# Altium PCB 24PowerF100.PcbDoc
Units mil, origin at the board's own origin, x right, y up, seen from the top; angles counter-clockwise.
Board outline 1675.62 x 1270.25 mil, 2 copper layers (Top Layer, Bottom Layer); 2 components, 3 nets, 25 pads, 0 vias.
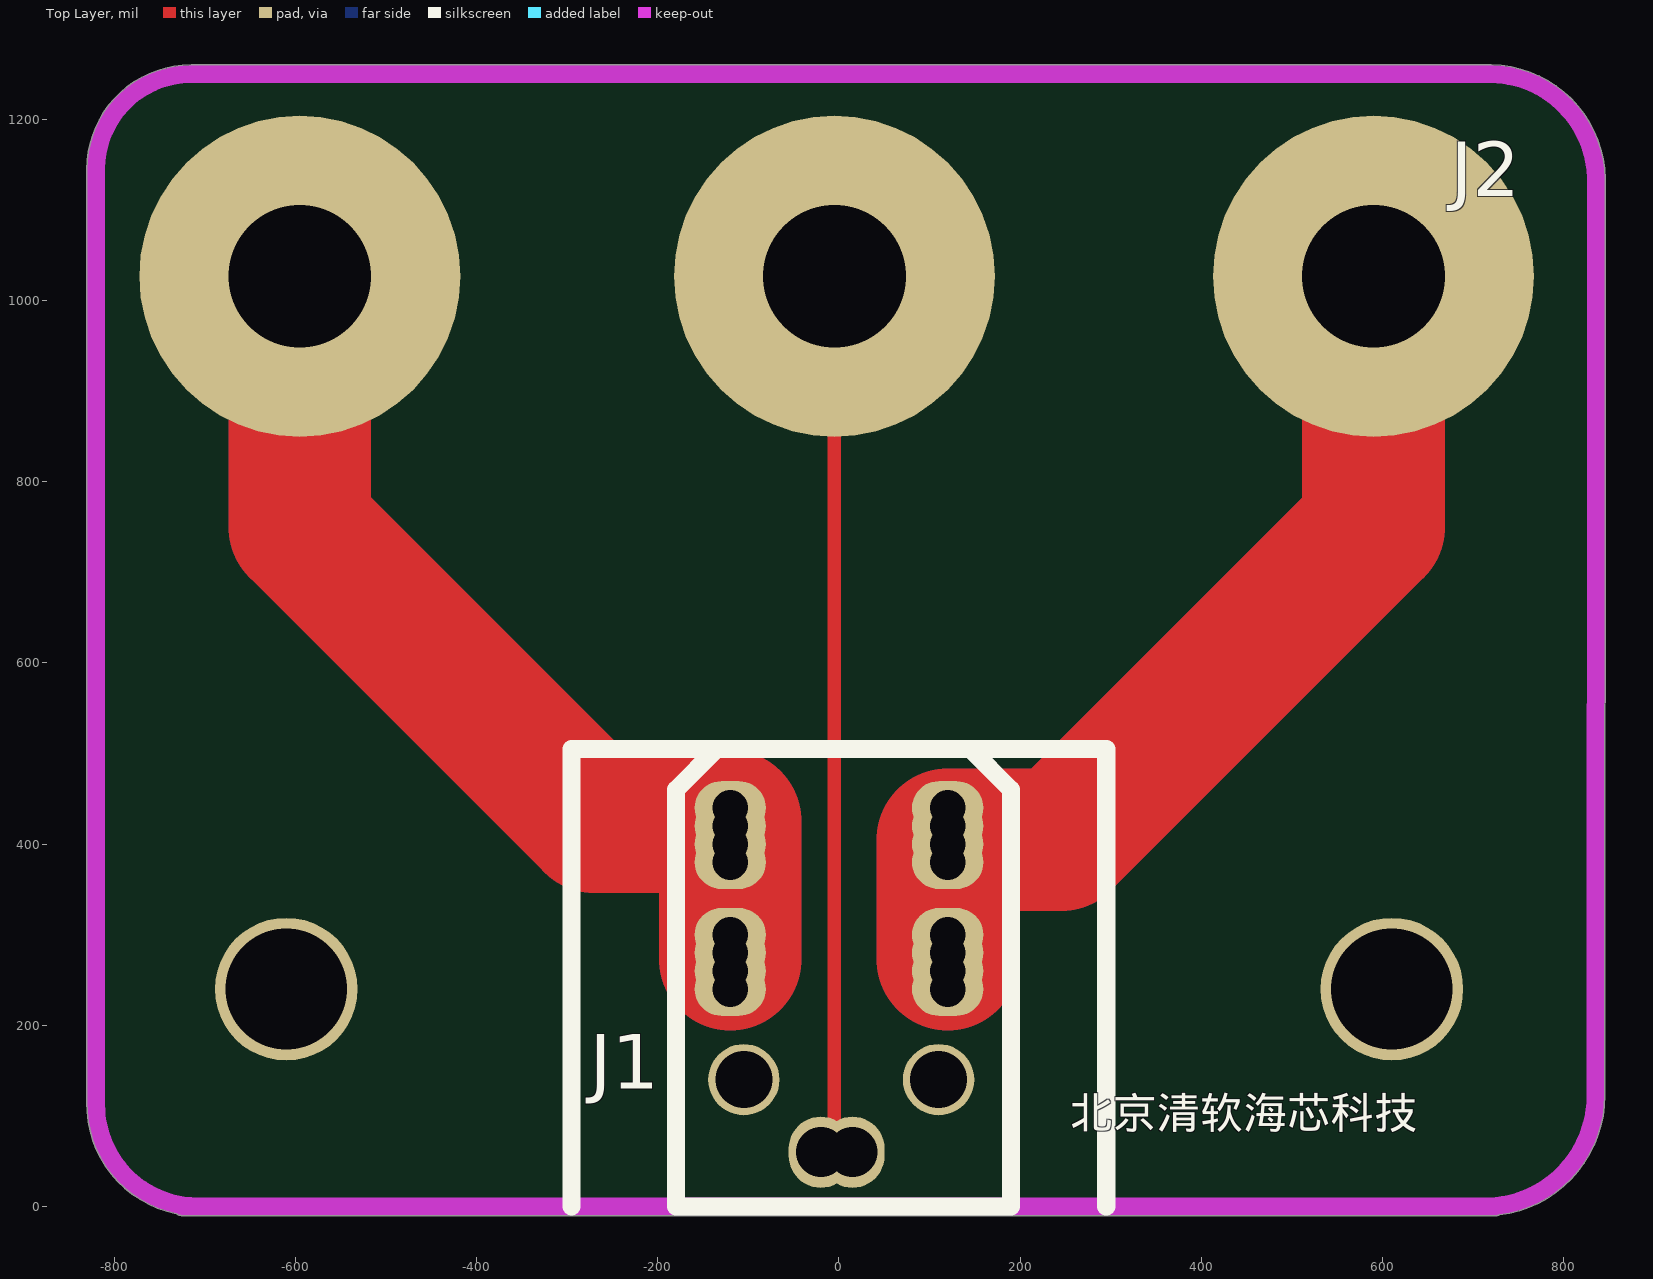
[diagram p0: Top Layer view]
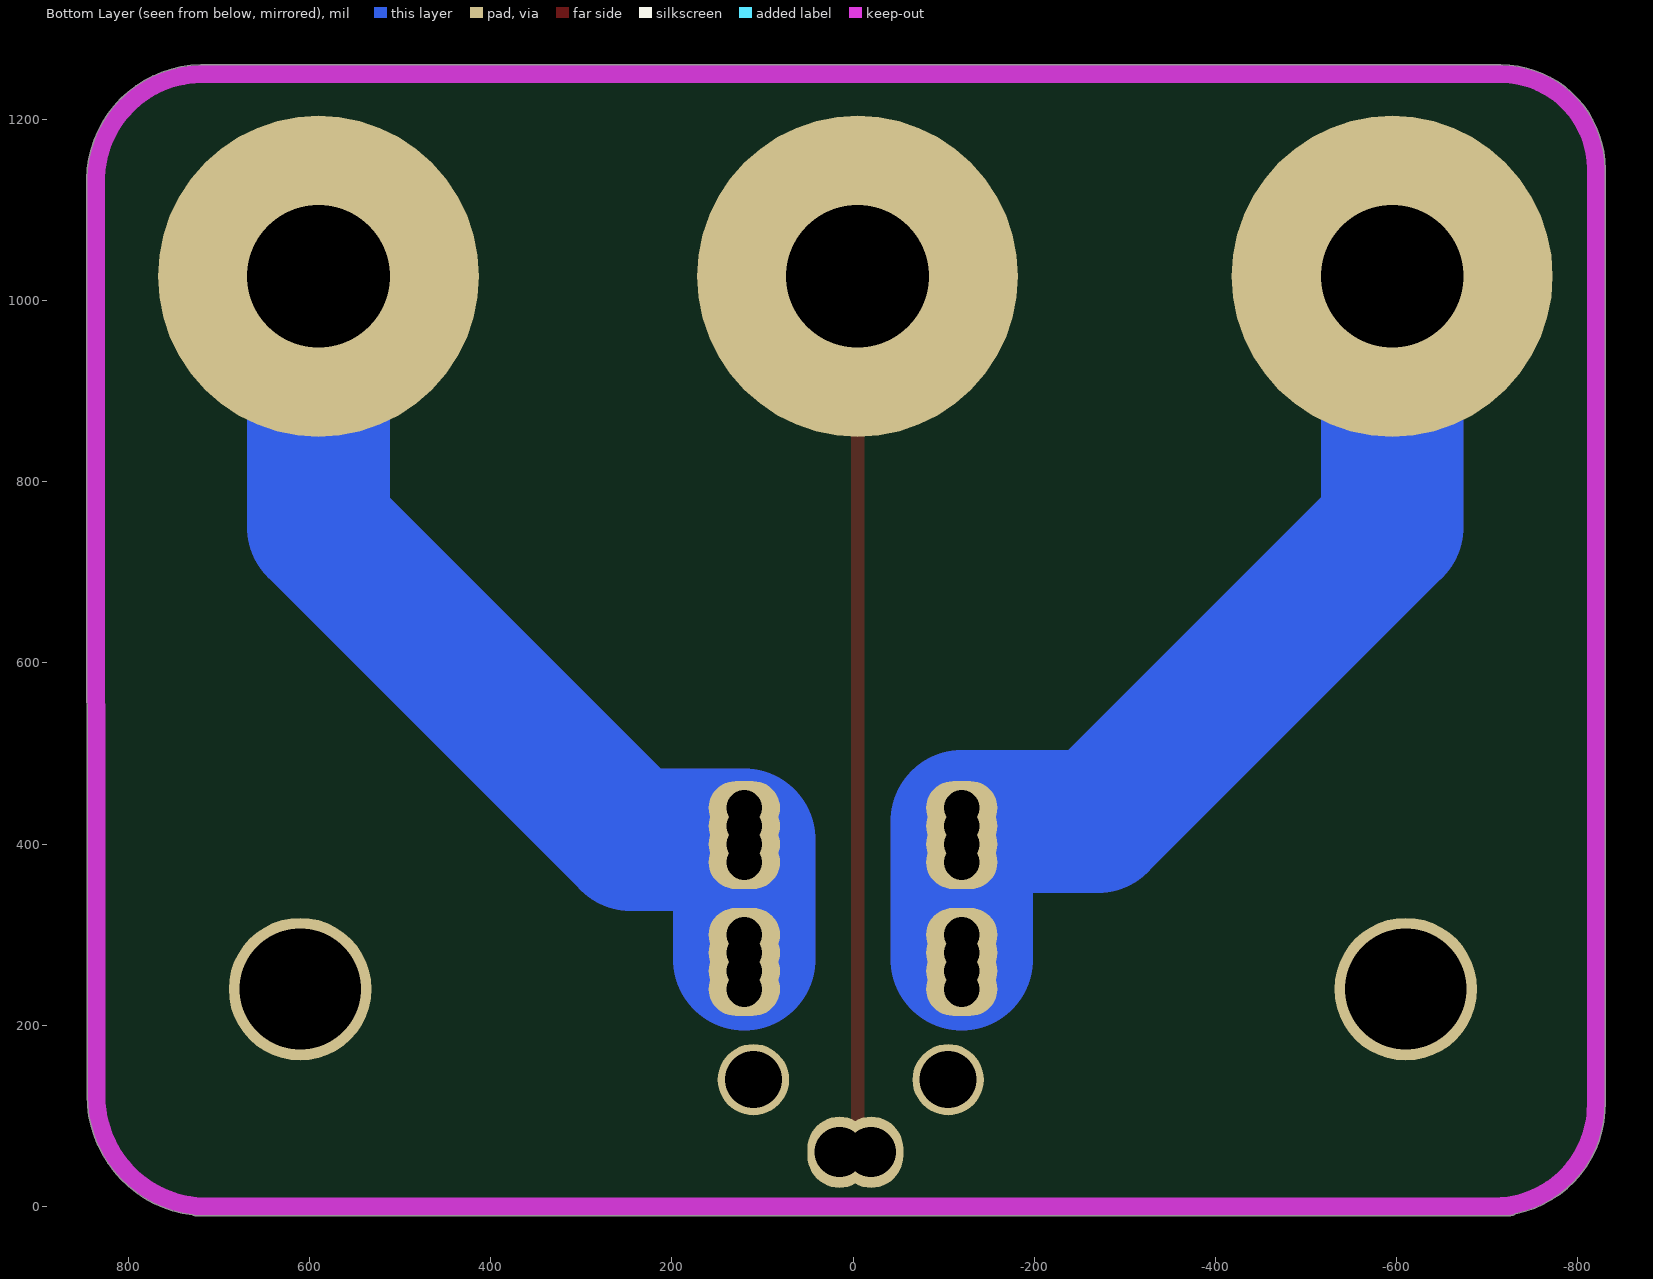
[diagram p1: Bottom Layer view, seen from below]

## Layer stack, top to bottom
Top Solder: solder mask 0.4, Solder Resist, Dk 3.5
Top Layer: signal copper 1.4
Dielectric 1: dielectric 12.6, FR-4, Dk 4.8
Bottom Layer: signal copper 1.4
Bottom Solder: solder mask 0.4, Solder Resist, Dk 3.5

## Board outline
-725,-10.01 -710.11,-10.01 ccw(c-707.5,112.5) -704.89,-10.01 707.99,-10.01 ccw(c710,-0.2) 709.79,-10.22 ccw(c712.5,122.5) 720.3,-10.01 725,-10.01 ccw(c725,0) 728.89,-9.23 ccw(c712.5,122.5) 845.24,122.5 ccw(c712.5,122.5) 845.22,125.1 845.6,985.98 ccw(c835.59,985.99) 845.6,985.99 845.6,1134.41 ccw(c835.59,1134.41) 845.6,1134.56 ccw(c718.26,1132.67) 720,1260.02 ccw(c718.26,1132.67) 716.51,1260.02 ccw(c718.26,1132.67) 716.44,1260.01 ccw(c718.26,1132.67) 716.36,1260.01 716.51,1260.01 -715,1260.01 ccw(c-715,1145) -830.01,1145 -830.01,960 -830.01,115.11 ccw(c-707.5,112.5) -731.42,-7.69 ccw(c-725,0)

## Design rules (kind name [scope] priority, off if disabled: settings)
Clearance [All] p1: gap=10
PolygonConnect [All] p1: connectstyle=Relief reliefconductorwidth=10 reliefentries=4 polygonreliefangle="90 Angle" airgapwidth=10
RoutingVias [All] p1: holewidth=28 width=50 viastyle="Through Hole" minholewidth=28 minwidth=50 maxholewidth=28 maxwidth=50
SolderMaskExpansion [All] p1: expansion=4
Width [All] p1: maxlimit=196.85 minlimit=10 preferedwidth=10
30 further rules are at their usual default settings.

## Components (designator, comment, footprint, x,y, rotation, side; value= is the part's Value field where it differs from the comment)
J1 "24VPower" 24VPower 0,55 r0 top
J2 "CON3" 24PowerB -595,950 r0 top

## Footprints (in the part's own frame and the unit in brackets; to place one, negate y for a bottom-side part, rotate by r counter-clockwise, add the part's x,y. Pads: shape width x height; smd on the part's side, far side on the other; paste and mask are expansions set on the pad)
24PowerB [mm]
  round 9 hole 4: 1(0,1.95) 2(14.986,1.95) 3(30.099,1.95)
24VPower [mm]
  oval 1.8x2 hole 1.4: 0(-0.508,0.127) 0(0.381,0.127)
  oval 2x1.5 hole 1: 1(-3.048,8.255) 1(-3.048,8.763) 1(-3.048,9.271) 1(-3.048,9.779) 2(-3.048,4.699) 2(-3.048,5.207) 2(-3.048,5.715) 2(-3.048,6.223) 3(3.048,8.255) 3(3.048,8.763) 3(3.048,9.271) 3(3.048,9.779) 4(3.048,4.699) 4(3.048,5.207) 4(3.048,5.715) 4(3.048,6.223)
  round 2 hole 1.6: 5(-2.667,2.159) 6(2.794,2.159)
  silkscreen extent -4.57,-1.4 4.83,11.43

## Free pads (board coordinates)
  round 157.48 hole 133.86: 4(610.24,240) 5(-610,240)

## Nets (pads, with @x,y where several pads share a name; then routed paths per layer and width w, separated by ;. In a path a pad name is that pad's centre, name@x,y a point inside that pad or via, vN(x,y) a via of type N, cw(c..) or ccw(c..) an arc to the next point about the centre after c; other vN are vias at no path point)
0V: J1.3 J1.4 J2.3 | length 2043.1
  Top Layer w157.48: J1.4@120,273.11 120,280 120,300 120,380 120,400 120,405 245,405 590,750 J2.3
  Bottom Layer w157.48: J1.4@120,273.11 120,280 120,300 120,380 120,400 120,405 245,405 590,750 J2.3
+24V: J1.1 J1.2 J2.1 | length 2076.6
  Top Layer w157.48: J2.1 -595,750 -270,425 -120,425 -120,420 -120,400 -120,380 -120,300 -120,280 J1.2@-120,273.11
  Bottom Layer w157.48: J2.1 -595,750 -270,425 -120,425 -120,420 -120,400 -120,380 -120,300 -120,280 J1.2@-120,273.11
LOW: J1.0 J2.2 | length 1003.3
  Top Layer w15: J2.2 -5,80 J1.0@15,60
  Bottom Layer w15: J2.2@-5,950 J2.2@5,940 ; J1.0@5,70 J1.0@15,60
pads on no net: J1.5 J1.6

## Keep-outs
Keep-Out Layer:
  lines w20: -725,0 725,0 ; -705,0 cw(c-707.5,112.5) -820,115 -820,960 -820,1145 cw(c-715,1145) -715,1250 -695,1250 716.51,1250 ; 710,-0.2 ccw(c712.5,122.5) 835.2,125 835.59,985.99 835.59,1134.41 ccw(c718.26,1132.67) 716.51,1250 ; 720,1250 716.51,1250

## Silkscreen, mask and mechanical layers (free items; w line width, h text height)
Top Overlay:
  lines w20: -295,0 -295,505 295,505 295,0
  text "北京清软海芯科技" at 255,75 h60